# Altium PCB main_board.PcbDoc (part 2 of 2)
Units mm, origin at the board's own origin, x right, y up, seen from the top; angles counter-clockwise.
Board outline 279.4 x 215.91 mm, 2 copper layers (Top Layer, Bottom Layer), stack 2.452 mm thick; 96 components, 340 nets, 967 pads, 108 vias.
Unrouted connection lines stored in the file: 86.
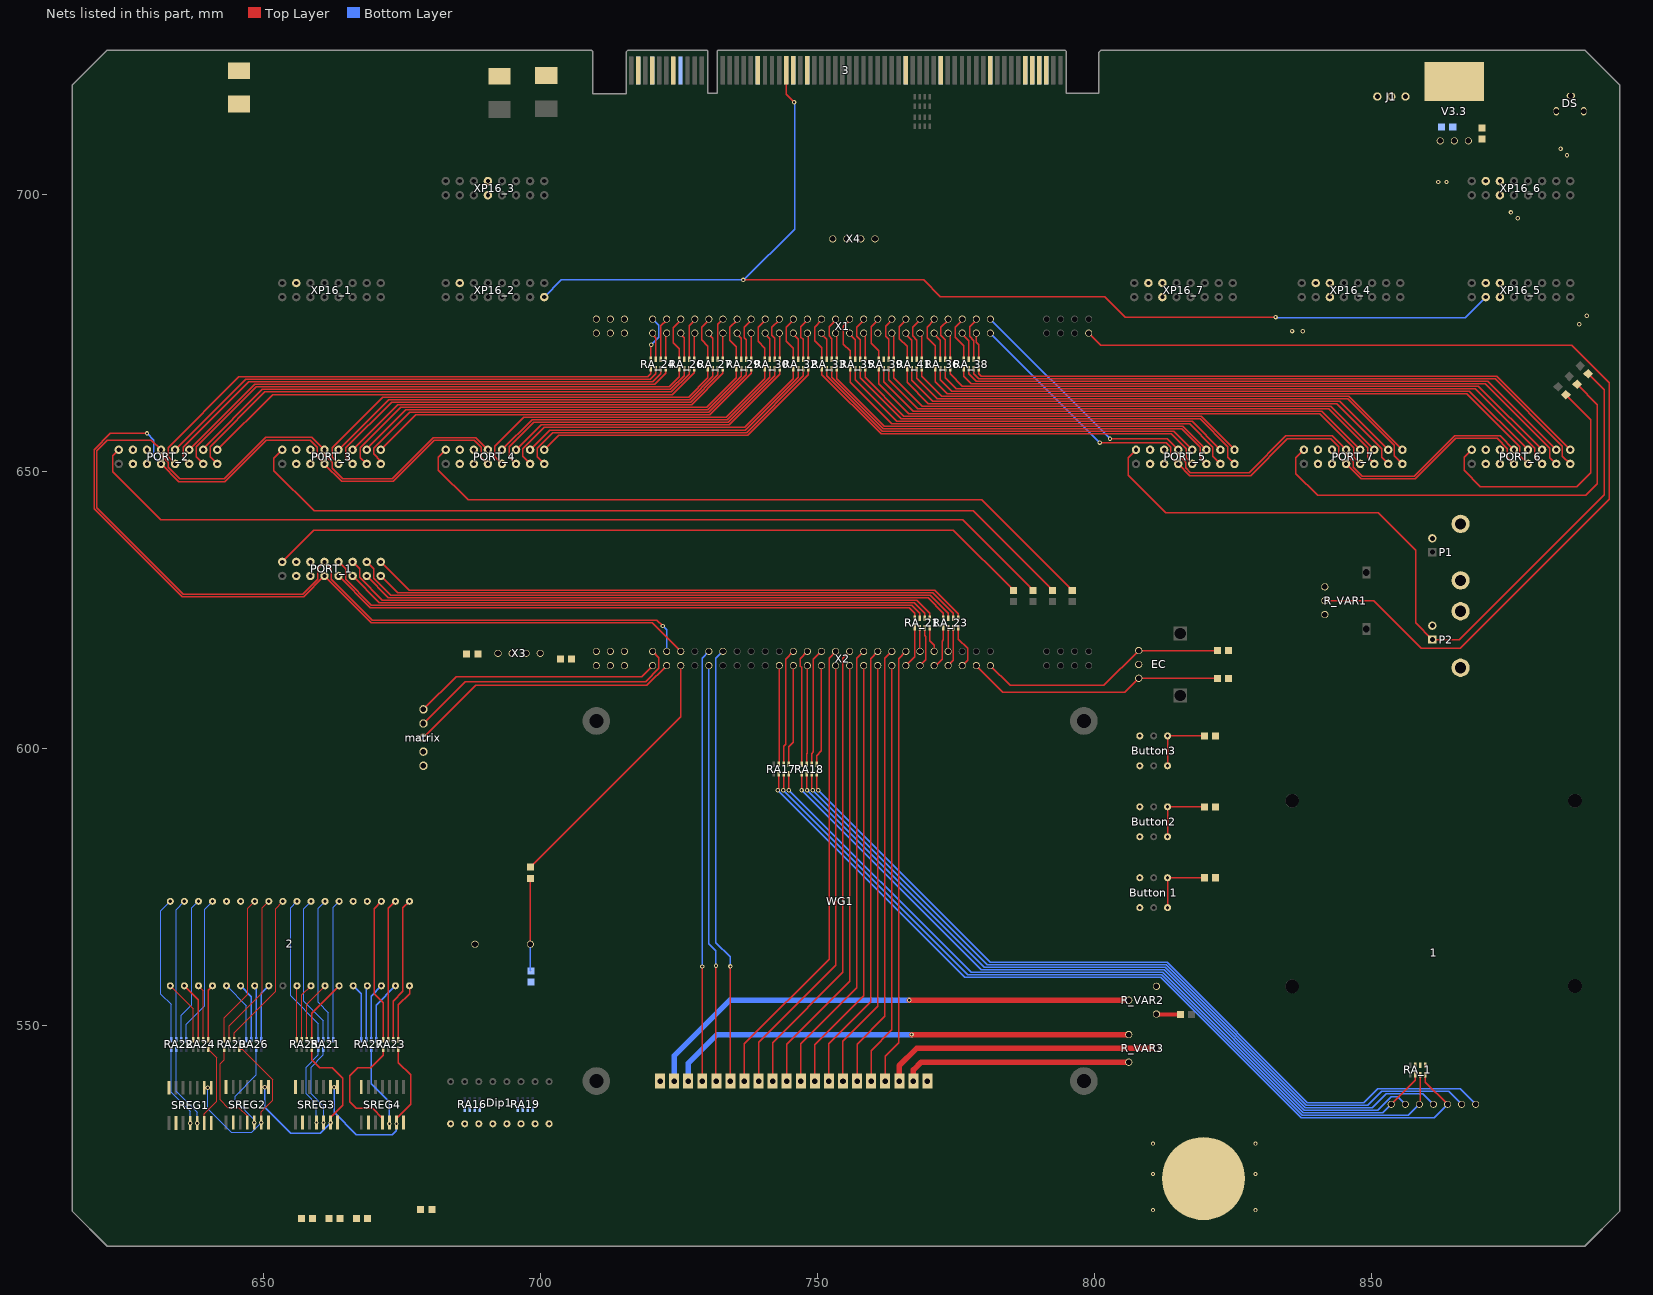
[diagram p2: the nets of this part, all layers, seen from the top]

## Via types
v1: diameter 0.8, hole 0.4, Top Layer to Bottom Layer, 102 vias
v2: diameter 0.7, hole 0.4, Top Layer to Bottom Layer, 6 vias

## Nets (pads, with @x,y where several pads share a name; then routed paths per layer and width w, separated by ;. In a path a pad name is that pad's centre, name@x,y a point inside that pad or via, vN(x,y) a via of type N, cw(c..) or ccw(c..) an arc to the next point about the centre after c; other vN are vias at no path point) (continued)
EAI_7-: 3.20 XP16_2.2 XP16_5.14 | length 217.9
  Top Layer w0.254: v1(736.5,684.6) 769.058,684.6 772.058,681.6 801.774,681.6 805.475,677.899 v1(832.598,677.899) ; 3.20@744.25,722.46 744.263,722.447 744.263,718.113 v1(745.7,716.676)
  Bottom Layer w0.254: XP16_2.2@700.59,681.5 703.69,684.6 v1(736.5,684.6) 736.6,684.6 745.774,693.774 v1@745.774,716.603 ; v1(832.598,677.899) 832.749,677.748 866.798,677.748 XP16_5.14@870.55,681.5
ENC_A: EC.1 R19.1 X2.36 | length 45.1
  Top Layer w0.254: X2.36@781.12,615 784.72,611.4 801.6,611.4 EC.1@807.9,617.7 R19.1@822.1,617.7
ENC_B: EC.3 R18.1 X2.37 | length 46.5
  Top Layer w0.254: X2.37@778.58,615 783.38,610.2 805.4,610.2 EC.3@807.9,612.7 R18.1@822.1,612.7
EVCC5: 3.62 3.63 3.64 J1.2
F1: RA22.0 SREG1.11 | length 14.8
  Bottom Layer w0.2: RA22.0@633.25,545.75 633.25,537.95 636.69,534.51 v1(636.69,532.4)
F2: RA20.7 SREG2.11 | length 16.8
  Top Layer w0.2: RA20.7@642.85,545.75 642.85,543.85 642.1,543.1 642.1,536.6 643.5,535.2 645.5,535.2 646.99,533.71 SREG2.11@646.99,532.5
F3: RA21.0 SREG3.11 | length 15
  Bottom Layer w0.2: v1(659.49,532.5) 659.49,535.81 657.6,537.7 657.6,542.5 659.85,544.75 RA21.0@659.85,545.75
F4: RA23.3 SREG4.11 | length 21.5
  Top Layer w0.254: SREG4.11@671.39,532.3 671.39,533.31 669.6,535.1 666.7,535.1 665.5,536.3 665.5,540.942 666.958,542.4 669.3,542.4 671.55,544.65 RA23.3@671.55,545.75
G1: RA22.1 SREG1.12 | length 14.9
  Bottom Layer w0.2: RA22.1@634.15,545.75 634.15,538.15 637.96,534.34 v1(637.96,532.4)
G2: RA26.2 SREG2.12 | length 16.3
  Bottom Layer w0.2: v1(648.26,532.5) 648.26,533.04 644.8,536.5 644.8,537.3 648.65,541.15 RA26.2@648.65,545.75
G3: RA21.1 SREG3.12 | length 15.2
  Top Layer w0.2: v1(660.76,532.5) SREG3.12@660.8,532.54
  Bottom Layer w0.2: RA21.1@660.75,545.75 660.75,544.75 658.5,542.5 658.5,537.7 660.76,535.44 v1(660.76,532.5)
G4: RA27.6 SREG4.12 | length 14.8
  Bottom Layer w0.254: RA27.6@669.35,545.75 669.35,539.55 672.66,536.24 v1(672.66,532.3)
GND: 3.1 3.3 3.6 3.16 3.21 3.23 3.37 3.42 3.49 3.54 3.55 3.56 3.57 3.65 3.70 3.77 3.82 3.96 3.98 3.103 3.112 3.116 3.118 "Button 1.1" "Button 1.4" Button2.1 Button2.4 Button3.1 Button3.4 C1.1 C2.1 C3.1 C4.1 C5.1 C6.2 C7.1 C10.2 C16.2 C17.2 Dip1.9 Dip1.10 Dip1.11 Dip1.12 Dip1.13 Dip1.14 Dip1.15 Dip1.16 DS.0 EC.2 matrix.2 P0RT_3.13 P0RT_3.14 P1.2 P2.2 pad.discharge PORT_1.13 PORT_1.14 PORT_2.13 PORT_2.14 PORT_4.13 PORT_4.14 PORT_5.13 PORT_5.14 PORT_6.13 PORT_6.14 PORT_7.13 PORT_7.14 R_VAR1.3 R_VAR2.3 Sound1.0 SREG1.7 SREG2.7 SREG3.7 SREG4.7 V3.3.0 WG1.0 WG1.19 X1.61 X1.62 X1.63 X2.0 X2.1 X2.2 X3.4 X4.4 XP16_1.13 XP16_2.13 XP16_3.9 XP16_3.10 XP16_4.13 XP16_5.13 XP16_6.13 XP16_7.13
  other v2: 810.5,516.7 829,516.7 810.5,523.2 829,523.2 810.5,528.7 829,528.7
H1: RA24.0 SREG1.13 | length 14.9
  Top Layer w0.2: SREG1.13@639.23,532.4 639.23,534.13 641.5,536.4 641.5,544.2 RA24.0@639.95,545.75
H2: RA20.4 SREG1.1 SREG1.2 SREG2.13 | length 34.1
  Top Layer w0.2: SREG1.2@639.23,538.8 v1(639.865,538.8) SREG1.1@640.5,538.8 ; RA20.4@645.55,545.75 646.05,545.75 651.6,540.2 651.6,536.5 649.53,534.43 v1(649.53,532.5)
  Bottom Layer w0.2: v1(639.865,538.8) 639.865,535.035 644.1,530.8 647.83,530.8 v1(649.53,532.5)
H3: RA25.4 SREG2.1 SREG2.2 SREG3.13 | length 37.2
  Top Layer w0.254: SREG2.2@649.53,538.9 v1(650.165,538.9) SREG2.1@650.8,538.9 ; RA25.4@658.65,545.75 658.65,543.85 660.1,542.4 662.3,542.4 664.2,540.5 664.2,535.6 662.03,533.43 v1(662.03,532.5)
  Bottom Layer w0.254: v1(650.165,538.9) 650.165,535.235 654.8,530.6 660.13,530.6 v1(662.03,532.5)
H4: RA23.0 SREG3.1 SREG3.2 SREG4.13 | length 35.8
  Top Layer w0.254: SREG3.2@662.03,538.9 v1(662.665,538.9) SREG3.1@663.3,538.9 ; v1(673.93,532.3) 673.93,533.23 676.5,535.8 676.5,541.1 674.25,543.35 RA23.0@674.25,545.75
  Bottom Layer w0.254: v1(662.665,538.9) 662.665,534.335 666.7,530.3 673.2,530.3 673.93,531.03 v1(673.93,532.3)
I2C_SCL: P0RT_3.9 PORT_1.9 PORT_2.9 PORT_4.9 R7.2 X2.4 X3.3 | length 220
  Top Layer w0.254: PORT_4.9@690.43,653.94 688.216,656.154 680.589,656.154 673.135,648.7 664.2,648.7 662.3,650.6 662.3,651.7 660.93,653.07 P0RT_3.9@660.93,653.94 658.67,656.2 650.3,656.2 642.8,648.7 634.8,648.7 632.7,650.8 632.7,651.7 631.43,652.97 PORT_2.9@631.43,653.94 629.67,655.7 621.742,655.7 619.837,653.795 619.837,643.471 635.414,627.895 657.01,627.895 659.7,630.585 659.7,632.483 PORT_1.9@660.93,633.713 662.146,632.496 662.146,630.598 669.545,623.2 720.94,623.2 v1(722,622.14)
  Bottom Layer w0.254: v1(722,622.14) 722.7,621.44 X2.4@722.7,617.54
I2C_SDA: P0RT_3.10 PORT_1.10 PORT_2.10 PORT_4.10 R8.2 X2.5 X3.2 | length 221
  Top Layer w0.254: v1(628.9,656.9) 622.3,656.9 619.383,653.983 619.383,643.283 635.226,627.441 657.198,627.441 PORT_1.10@660.93,631.173 669.403,622.7 720.08,622.7 X2.5@725.24,617.54 ; PORT_2.10@631.43,651.4 634.63,648.2 642.942,648.2 650.412,655.67 658.359,655.67 659.6,654.429 659.6,652.73 P0RT_3.10@660.93,651.4 660.93,651.328 664.012,648.246 673.323,648.246 680.777,655.7 687.934,655.7 689.2,654.434 689.2,652.63 PORT_4.10@690.43,651.4
  Bottom Layer w0.254: v1(628.9,656.9) 630.1,655.7 630.1,652.73 PORT_2.10@631.43,651.4
KLAV_STB1: RA17.2 X2.13 | length 21.1
  Top Layer w0.254: RA17.2@743.85,597.15 743.85,600.45 744.198,600.798 744.198,616.178 X2.13@745.56,617.54
KLAV_STB2: RA17.3 X2.50 | length 18.2
  Top Layer w0.254: RA17.3@744.75,597.15 744.75,600.35 745.56,601.16 X2.50@745.56,615
KLAV_STB3: RA17.1 X2.51 | length 17.8
  Top Layer w0.254: RA17.1@743.02,597.22 X2.51@743.02,615
KLAV_STR1: RA18.0 X2.14 | length 21
  Top Layer w0.254: RA18.0@747.05,597.15 747.05,614.65 746.8,614.9 746.8,616.24 X2.14@748.1,617.54
KLAV_STR2: RA18.3 X2.48 | length 18.2
  Top Layer w0.254: RA18.3@749.75,597.15 749.75,598.75 750.64,599.64 X2.48@750.64,615
KLAV_STR3: RA18.2 X2.15 | length 21.1
  Top Layer w0.254: RA18.2@748.85,597.15 748.85,599.05 749.198,599.398 749.198,616.098 X2.15@750.64,617.54
KLAV_STR4: RA18.1 X2.49 | length 17.9
  Top Layer w0.254: RA18.1@747.95,597.15 747.95,599.05 748.1,599.2 X2.49@748.1,615
LCD_CS1: WG1.14 X2.8 | length 79.1
  Top Layer w0.254: WG1.14@734.2,540 v1(734.2,560.7)
  Bottom Layer w0.254: X2.8@732.86,617.54 731.6,616.28 731.6,565 734.2,562.4 v1(734.2,560.7)
LCD_CS2: WG1.15 X2.56 | length 75.6
  Top Layer w0.254: v1(731.6,560.8) 731.6,540.06 WG1.15@731.66,540
  Bottom Layer w0.254: X2.56@730.32,615 730.32,564.8 731.6,563.52 v1(731.6,560.8)
LCD_D/I: WG1.3 X2.21 | length 79.1
  Top Layer w0.254: WG1.3@762.14,540 762.14,544.44 764.6,546.9 764.6,616.26 X2.21@765.88,617.54
LCD_DB0: WG1.6 X2.44 | length 77.6
  Top Layer w0.254: WG1.6@754.52,540 754.52,547.22 760.8,553.5 X2.44@760.8,615
LCD_DB1: WG1.7 X2.19 | length 81.2
  Top Layer w0.254: WG1.7@751.98,540 751.98,546.78 759.5,554.3 759.5,616.24 X2.19@760.8,617.54
LCD_DB2: WG1.8 X2.45 | length 78.7
  Top Layer w0.254: WG1.8@749.44,540 749.44,546.54 758.26,555.36 X2.45@758.26,615
LCD_DB3: WG1.9 X2.18 | length 82.2
  Top Layer w0.254: WG1.9@746.9,540 746.9,546.7 757,556.8 757,616.28 X2.18@758.26,617.54
LCD_DB4: WG1.10 X2.46 | length 79.7
  Top Layer w0.254: WG1.10@744.36,540 744.36,546.66 755.72,558.02 X2.46@755.72,615
LCD_DB5: WG1.11 X2.17 | length 83.3
  Top Layer w0.254: WG1.11@741.82,540 741.82,546.92 754.5,559.6 754.5,616.32 X2.17@755.72,617.54
LCD_DB6: WG1.12 X2.47 | length 80.8
  Top Layer w0.254: WG1.12@739.28,540 739.28,546.98 753.18,560.88 X2.47@753.18,615
LCD_DB7: WG1.13 X2.16 | length 84.3
  Top Layer w0.254: WG1.13@736.74,540 736.74,546.74 752,562 752,616.36 X2.16@753.18,617.54
LCD_OE: WG1.5 X2.20 | length 80.1
  Top Layer w0.254: WG1.5@757.06,540 757.06,546.66 762.1,551.7 762.1,616.3 X2.20@763.34,617.54
LCD_R/W: WG1.4 X2.43 | length 76.5
  Top Layer w0.254: WG1.4@759.6,540 759.6,545.5 763.34,549.24 X2.43@763.34,615
LCD_RST: WG1.16 X2.7 | length 78
  Top Layer w0.254: WG1.16@729.12,540 v1(729.12,560.68)
  Bottom Layer w0.254: v1(729.12,560.68) 729.12,616.34 X2.7@730.32,617.54
LCD_VOUT: R_VAR3.1 WG1.17 | length 84.9
  Top Layer w1: v1(766.9,548.4) R_VAR3.1@806.1,548.4
  Bottom Layer w1: WG1.17@726.58,540 726.58,543.18 731.8,548.4 v1(766.9,548.4)
LM_CLK: matrix.5 X2.60 | length 44.6
  Top Layer w0.254: matrix.5@678.8,607.08 684.72,613 718.16,613 X2.60@720.16,615
LM_CS: matrix.4 X2.3 | length 50.1
  Top Layer w0.254: matrix.4@678.8,604.54 686.36,612.1 718.9,612.1 721.3,614.5 721.3,616.4 X2.3@720.16,617.54
LM_DIN: matrix.3 X2.59 | length 49.3
  Top Layer w0.254: matrix.3@678.8,602 688.2,611.4 719.1,611.4 X2.59@722.7,615
Net1_1: 1.1 RA17.4 RA_1.2 | length 143.6
  Top Layer w0.254: v1(744.75,592.5) RA17.4@744.75,595.45 ; 1.1@853.48,535.8 857.85,540.17 RA_1.2@857.85,541.15
  Bottom Layer w0.254: v1(744.75,592.5) 777.642,559.608 812.276,559.608 837.6,534.284 851.964,534.284 1.1@853.48,535.8
Net1_2: 1.2 RA18.7 | length 137.5
  Top Layer w0.254: v1(747.05,592.5) RA18.7@747.05,595.45
  Bottom Layer w0.254: v1(747.05,592.5) 747.05,592.472 779.46,560.062 812.464,560.062 837.788,534.738 851.058,534.738 853.52,537.2 854.62,537.2 1.2@856.02,535.8
Net1_3: 1.3 RA17.5 RA_1.1 | length 148.4
  Top Layer w0.254: v1(743.75,592.5) 743.85,592.6 RA17.5@743.85,595.45 ; 1.3@858.56,535.8 858.75,535.99 RA_1.1@858.75,541.15
  Bottom Layer w0.254: v1(743.75,592.5) 743.75,592.472 777.068,559.154 812.088,559.154 837.412,533.83 856.59,533.83 1.3@858.56,535.8
Net1_4: 1.4 RA18.6 | length 141.6
  Top Layer w0.254: RA18.6@747.95,595.45 747.95,592.6 v1(748.05,592.5)
  Bottom Layer w0.254: v1(748.05,592.5) 748.05,592.472 780.006,560.516 812.652,560.516 837.976,535.192 850.092,535.192 852.6,537.7 859.2,537.7 1.4@861.1,535.8
Net1_5: 1.5 RA17.6 RA_1.0 | length 156.4
  Top Layer w0.254: v1(742.75,592.5) 742.95,592.7 RA17.6@742.95,595.45 ; RA_1.0@859.65,541.15 859.65,539.79 1.5@863.64,535.8
  Bottom Layer w0.254: v1(742.75,592.5) 742.75,592.472 776.522,558.7 811.9,558.7 837.224,533.376 861.216,533.376 1.5@863.64,535.8
Net1_6: 1.6 RA18.5 | length 145.7
  Top Layer w0.254: RA18.5@748.85,595.45 748.85,592.7 v1(749.05,592.5)
  Bottom Layer w0.254: v1(749.05,592.5) 749.05,592.472 780.552,560.97 812.84,560.97 838.164,535.646 849.246,535.646 851.754,538.154 863.826,538.154 1.6@866.18,535.8
Net1_7: 1.7 RA18.4 | length 147.3
  Top Layer w0.254: RA18.4@749.75,595.45 749.75,592.828 750.05,592.528 v1(750.05,592.5)
  Bottom Layer w0.254: v1(750.05,592.5) 781.126,561.424 813.028,561.424 838.352,536.1 848.5,536.1 851.008,538.608 865.912,538.608 1.7@868.72,535.8
Net2_1: 2.1 RA24.4 | length 11.5
  Top Layer w0.2: 2.1@633.1,557.2 637.25,553.05 RA24.4@637.25,547.45
Net2_2: 2.2 RA24.5 | length 10.8
  Top Layer w0.254: 2.2@635.64,557.2 638.15,554.69 RA24.5@638.15,547.45
Net2_3: 2.3 RA24.6 | length 10.1
  Top Layer w0.2: 2.3@638.18,557.2 639.05,556.33 RA24.6@639.05,547.45
Net2_4: 2.4 RA24.7 | length 10.1
  Top Layer w0.254: RA24.7@639.95,547.45 639.95,556.43 2.4@640.72,557.2
Net2_5: 2.5 RA26.7 | length 11.2
  Bottom Layer w0.2: 2.5@643.26,557.2 646.85,553.61 RA26.7@646.85,547.45
Net2_6: 2.6 RA26.6 | length 10.6
  Bottom Layer w0.254: 2.6@645.8,557.2 647.75,555.25 RA26.6@647.75,547.45
Net2_7: 2.7 RA26.5 | length 9.9
  Bottom Layer w0.254: 2.7@648.34,557.2 648.65,556.89 RA26.5@648.65,547.45
Net2_8: 2.8 RA26.4 | length 10.3
  Bottom Layer w0.254: RA26.4@649.55,547.45 649.55,555.87 2.8@650.88,557.2
Net2_10: 2.10 RA25.0 | length 9.7
  Top Layer w0.2: RA25.0@655.95,547.45 2.10@655.95,557.19
Net2_11: 2.11 RA25.1 | length 10.4
  Top Layer w0.2: RA25.1@656.85,547.45 656.85,555.55 2.11@658.5,557.2
Net2_12: 2.12 RA25.2 | length 11.1
  Top Layer w0.2: RA25.2@657.75,547.45 657.75,553.91 2.12@661.04,557.2
Net2_13: 2.13 RA25.3 | length 11.8
  Top Layer w0.254: RA25.3@658.65,547.45 658.65,552.27 2.13@663.58,557.2
Net2_14: 2.14 RA27.3 | length 10.3
  Bottom Layer w0.254: 2.14@666.12,557.2 667.55,555.77 RA27.3@667.55,547.45
Net2_15: 2.15 RA27.2 | length 9.8
  Bottom Layer w0.254: RA27.2@668.45,547.45 668.45,556.99 2.15@668.66,557.2
Net2_16: 2.16 RA27.1 | length 10.5
  Bottom Layer w0.254: RA27.1@669.35,547.45 669.35,555.35 2.16@671.2,557.2
Net2_17: 2.17 RA27.0 | length 11.2
  Bottom Layer w0.254: RA27.0@670.25,547.45 670.25,553.71 2.17@673.74,557.2
Net2_18: 2.18 RA23.7 | length 10.6
  Top Layer w0.254: RA23.7@674.25,547.45 674.25,553.75 676.28,555.78 2.18@676.28,557.2
Net2_19: 2.19 RA23.6 | length 26.2
  Top Layer w0.254: RA23.6@673.35,547.45 673.35,554.45 675.1,556.2 675.1,571.26 2.19@676.28,572.44
Net2_20: 2.20 RA23.5 | length 25.5
  Top Layer w0.254: RA23.5@672.45,547.45 672.45,571.15 2.20@673.74,572.44
Net2_21: 2.21 RA23.4 | length 26.2
  Top Layer w0.254: 2.21@671.2,572.44 669.9,571.14 669.9,555.8 671.55,554.15 RA23.4@671.55,547.45
Net2_24: 2.24 RA21.4 | length 25.4
  Bottom Layer w0.2: RA21.4@662.55,547.45 662.55,571.41 2.24@663.58,572.44
Net2_25: 2.25 RA21.5 | length 26.3
  Bottom Layer w0.2: 2.25@661.04,572.44 659.8,571.2 659.8,554.2 661.65,552.35 RA21.5@661.65,547.45
Net2_26: 2.26 RA21.6 | length 27
  Bottom Layer w0.2: 2.26@658.5,572.44 657.2,571.14 657.2,554.4 660.75,550.85 RA21.6@660.75,547.45
Net2_27: 2.27 RA21.7 | length 27.6
  Bottom Layer w0.2: 2.27@655.96,572.44 654.8,571.28 654.8,555.4 659.85,550.35 RA21.7@659.85,547.45
Net2_28: 2.28 RA20.2 | length 28.6
  Top Layer w0.2: RA20.2@644.65,547.45 644.65,548.75 652.1,556.2 652.1,571.12 2.28@653.42,572.44
Net2_29: 2.29 RA20.1 | length 27.9
  Top Layer w0.2: RA20.1@643.75,547.45 643.75,549.95 649.7,555.9 649.7,571.26 2.29@650.88,572.44
Net2_30: 2.30 RA20.0 | length 27.3
  Top Layer w0.2: RA20.0@642.85,547.45 642.85,551.45 647.1,555.7 647.1,571.2 2.30@648.34,572.44
Net2_33: 2.33 RA22.4 | length 27
  Bottom Layer w0.2: RA22.4@635.95,547.45 635.95,550.25 639.3,553.6 639.3,571.02 2.33@640.72,572.44
Net2_34: 2.34 RA22.5 | length 26.3
  Bottom Layer w0.2: RA22.5@635.05,547.45 635.05,551.85 637,553.8 637,571.26 2.34@638.18,572.44
Net2_35: 2.35 RA22.6 | length 25.6
  Bottom Layer w0.2: RA22.6@634.15,547.45 634.15,570.95 2.35@635.64,572.44
Net2_36: 2.36 RA22.7 | length 26.5
  Bottom Layer w0.2: 2.36@633.1,572.44 631.4,570.74 631.4,555.7 633.25,553.85 RA22.7@633.25,547.45
NetButton2_3: Button2.3 Button2.6 R10.2 | length 12.1
  Top Layer w0.254: Button2.6@813.1,584.1 Button2.3@813.1,589.5 R10.2@819.8,589.5
NetButton3_3: Button3.3 Button3.6 R11.2 | length 12.1
  Top Layer w0.254: Button3.6@813.1,596.9 Button3.3@813.1,602.3 R11.2@819.8,602.3
"NetButton 1_3": "Button 1.3" "Button 1.6" R9.2 | length 12.1
  Top Layer w0.254: 813.1,571.3 813.1,576.7 R9.2@819.8,576.7
NetC1_2: C1.2 R6.2 Sound1.1 | length 16.7
  Top Layer w0.254: Sound1.1@698.1,564.7 R6.2@698.1,576.6
  Bottom Layer w0.254: Sound1.1@698.1,564.7 698.1,560 C1.2@698.2,559.9
NetR2_1: R2.1 R_VAR2.1 | length 4.3
  Top Layer w0.7: R_VAR2.1@811.1,552.1 811.2,552 R2.1@815.4,552
NetR_VAR2_2: R_VAR2.2 WG1.18 | length 90.8
  Top Layer w1: v1(766.5,554.6) R_VAR2.2@806.1,554.6
  Bottom Layer w1: WG1.18@724.04,540 724.04,544.54 734.1,554.6 v1(766.5,554.6)
NetR_VAR3_2: R_VAR3.2 WG1.2 | length 50.5
  Top Layer w1: WG1.2@764.68,540 764.68,542.78 767.8,545.9 R_VAR3.2@811.1,545.9
PGIO_1_1: PORT_1.1 RA_23.7 | length 109
  Top Layer w0.254: PORT_1.1@671.09,633.713 676.203,628.6 771.124,628.6 775.35,624.374 RA_23.7@775.35,623.55
PGIO_1_2: PORT_1.2 RA_23.6 | length 107
  Top Layer w0.254: PORT_1.2@671.09,631.173 674.117,628.146 770.73,628.146 774.45,624.426 RA_23.6@774.45,623.55
PGIO_1_3: PORT_1.3 RA_23.5 | length 110.7
  Top Layer w0.254: PORT_1.3@668.55,633.713 669.8,632.463 669.8,630.8 672.908,627.692 770.313,627.692 773.55,624.455 RA_23.5@773.55,623.55
PGIO_1_4: PORT_1.4 RA_23.4 | length 107.8
  Top Layer w0.254: PORT_1.4@668.55,631.173 672.485,627.238 769.867,627.238 772.65,624.455 RA_23.4@772.65,623.55
PGIO_1_5: PORT_1.5 RA_21.3 | length 109.8
  Top Layer w0.254: PORT_1.5@666.01,633.713 667.257,632.466 667.257,630.926 671.399,626.784 767.821,626.784 770.15,624.455 RA_21.3@770.15,623.55
PGIO_1_6: PORT_1.6 RA_21.2 | length 106.9
  Top Layer w0.254: PORT_1.6@666.01,631.173 670.853,626.33 767.375,626.33 769.25,624.455 RA_21.2@769.25,623.55
PGIO_1_7: PORT_1.7 RA_21.1 | length 110.7
  Top Layer w0.254: PORT_1.7@663.47,633.713 664.728,632.455 664.728,630.557 669.409,625.876 766.929,625.876 768.35,624.455 RA_21.1@768.35,623.55
PGIO_1_8: PORT_1.8 RA_21.0 | length 107.7
  Top Layer w0.254: PORT_1.8@663.47,631.173 669.221,625.422 766.483,625.422 767.45,624.455 RA_21.0@767.45,623.55
PGIO_1_15_AO1: PORT_1.15 R1.1 | length 138.8
  Top Layer w0.254: PORT_1.15@653.31,633.713 658.997,639.4 774.461,639.4 R1.1@785.3,628.561
PGIO_2_1: PORT_2.1 RA_26.4 | length 92.6
  Top Layer w0.254: PORT_2.1@641.59,653.94 651.572,663.922 723.748,663.922 727.686,667.86 RA_26.4@727.686,668.55
PGIO_2_2: PORT_2.2 RA_26.5 | length 96.5
  Top Layer w0.254: PORT_2.2@641.59,651.4 640.3,652.69 640.3,654.5 650.176,664.376 723.56,664.376 726.786,667.602 RA_26.5@726.786,668.55
PGIO_2_3: PORT_2.3 RA_26.6 | length 93.7
  Top Layer w0.254: PORT_2.3@639.05,653.94 639.05,654.15 649.73,664.83 723.372,664.83 725.886,667.344 RA_26.6@725.886,668.55
PGIO_2_4: PORT_2.4 RA_26.7 | length 97.5
  Top Layer w0.254: PORT_2.4@639.05,651.4 637.8,652.65 637.8,654.5 648.584,665.284 723.184,665.284 724.986,667.086 RA_26.7@724.986,668.55
PGIO_2_5: PORT_2.5 RA_24.0 | length 92.6
  Top Layer w0.254: PORT_2.5@636.51,653.94 648.308,665.738 720.538,665.738 722.55,667.75 RA_24.0@722.55,668.55
PGIO_2_6: PORT_2.6 RA_24.1 | length 96.1
  Top Layer w0.254: PORT_2.6@636.51,651.4 635.421,652.489 635.421,654.391 647.222,666.192 720.197,666.192 721.65,667.645 RA_24.1@721.65,668.55
PGIO_2_7: PORT_2.7 RA_24.2 | length 93.4
  Top Layer w0.254: PORT_2.7@633.97,653.94 646.676,666.646 719.751,666.646 720.75,667.645 RA_24.2@720.75,668.55
PGIO_2_8: PORT_2.8 RA_24.3 | length 97
  Top Layer w0.254: PORT_2.8@633.97,651.4 632.7,652.67 632.7,654.3 645.5,667.1 719.305,667.1 719.85,667.645 RA_24.3@719.85,668.55
PGIO_2_15_AO2: PORT_2.15 R17.1 | length 179.4
  Top Layer w0.254: PORT_2.15@623.81,653.94 622.7,652.83 622.7,650 631.4,641.3 776.094,641.3 R17.1@788.833,628.561
PGIO_3_1: P0RT_3.1 RA_29.0 | length 73.4
  Top Layer w0.254: P0RT_3.1@671.09,653.94 677.44,660.29 730.49,660.29 737.959,667.759 RA_29.0@737.959,668.55
PGIO_3_2: P0RT_3.2 RA_29.1 | length 77.1
  Top Layer w0.254: P0RT_3.2@671.09,651.4 671.09,651.91 669.8,653.2 669.8,654.19 676.354,660.744 730.302,660.744 737.059,667.501 RA_29.1@737.059,668.55
PGIO_3_3: P0RT_3.3 RA_29.2 | length 74.5
  Top Layer w0.254: P0RT_3.3@668.55,653.94 668.55,654.15 675.598,661.198 730.114,661.198 736.159,667.243 RA_29.2@736.159,668.55
PGIO_3_4: P0RT_3.4 RA_29.3 | length 78.1
  Top Layer w0.254: P0RT_3.4@668.55,651.4 667.4,652.55 667.4,654.33 674.722,661.652 729.926,661.652 735.259,666.985 RA_29.3@735.259,668.55
PGIO_3_5: P0RT_3.5 RA_27.0 | length 73.3
  Top Layer w0.254: P0RT_3.5@666.01,653.94 674.176,662.106 727.206,662.106 732.823,667.723 RA_27.0@732.823,668.55
PGIO_3_6: P0RT_3.6 RA_27.1 | length 77
  Top Layer w0.254: P0RT_3.6@666.01,651.4 664.8,652.61 664.8,654.27 673.09,662.56 727.018,662.56 731.923,667.465 RA_27.1@731.923,668.55
PGIO_3_7: P0RT_3.7 RA_27.2 | length 74.4
  Top Layer w0.254: P0RT_3.7@663.47,653.94 672.544,663.014 726.83,663.014 731.023,667.207 RA_27.2@731.023,668.55
PGIO_3_8: P0RT_3.8 RA_27.3 | length 78.1
  Top Layer w0.254: P0RT_3.8@663.47,651.4 662.3,652.57 662.3,654.31 671.458,663.468 726.642,663.468 730.123,666.949 RA_27.3@730.123,668.55
PGIO_3_15_AO3: P0RT_3.15 R12.1 | length 153.9
  Top Layer w0.254: P0RT_3.15@653.31,653.94 651.8,652.43 651.8,650.2 659.1,642.9 778.027,642.9 R12.1@792.367,628.561
PGIO_4_1: PORT_4.1 RA_32.4 | length 54.3
  Top Layer w0.254: PORT_4.1@700.59,653.94 703.25,656.6 737.3,656.6 748.232,667.532 RA_32.4@748.232,668.55
PGIO_4_2: PORT_4.2 RA_32.5 | length 58.1
  Top Layer w0.254: PORT_4.2@700.59,651.4 699.3,652.69 699.3,654.2 702.154,657.054 737.112,657.054 747.332,667.274 RA_32.5@747.332,668.55
PGIO_4_3: PORT_4.3 RA_32.6 | length 55.3
  Top Layer w0.254: PORT_4.3@698.05,653.94 701.618,657.508 736.924,657.508 746.432,667.016 RA_32.6@746.432,668.55
PGIO_4_4: PORT_4.4 RA_32.7 | length 59.1
  Top Layer w0.254: PORT_4.4@698.05,651.4 696.7,652.75 696.7,654.13 700.59,658.02 736.794,658.02 745.532,666.758 RA_32.7@745.532,668.55
PGIO_4_5: PORT_4.5 RA_30.4 | length 54.2
  Top Layer w0.254: PORT_4.5@695.51,653.94 700.044,658.474 734,658.474 743.095,667.569 RA_30.4@743.095,668.55
PGIO_4_6: PORT_4.6 RA_30.5 | length 58
  Top Layer w0.254: PORT_4.6@695.51,651.4 694.3,652.61 694.3,654.5 698.728,658.928 733.812,658.928 742.195,667.311 RA_30.5@742.195,668.55
PGIO_4_7: PORT_4.7 RA_30.6 | length 55.3
  Top Layer w0.254: PORT_4.7@692.97,653.94 698.412,659.382 733.624,659.382 741.295,667.053 RA_30.6@741.295,668.55
PGIO_4_8: PORT_4.8 RA_30.7 | length 59.2
  Top Layer w0.254: PORT_4.8@692.97,651.4 691.7,652.67 691.7,654.6 696.936,659.836 733.436,659.836 740.395,666.795 RA_30.7@740.395,668.55
PGIO_4_15_AO4: PORT_4.15 R15.1 | length 127.6
  Top Layer w0.254: PORT_4.15@682.81,653.94 681.5,652.63 681.5,650.261 686.861,644.9 779.561,644.9 R15.1@795.9,628.561
PGIO_5_1: PORT_5.1 RA_35.0 | length 73.6
  Top Layer w0.254: RA_35.0@758.505,668.55 758.505,666.995 765.522,659.978 819.152,659.978 PORT_5.1@825.19,653.94
PGIO_5_2: PORT_5.2 RA_35.1 | length 76.8
  Top Layer w0.254: RA_35.1@757.605,668.55 757.605,666.923 765.003,659.524 818.964,659.524 824,654.488 824,652.59 PORT_5.2@825.19,651.4
PGIO_5_3: PORT_5.3 RA_35.2 | length 73.2
  Top Layer w0.254: RA_35.2@756.705,668.55 756.705,666.55 764.184,659.07 817.52,659.07 PORT_5.3@822.65,653.94
PGIO_5_4: PORT_5.4 RA_35.3 | length 76.3
  Top Layer w0.254: RA_35.3@755.805,668.55 755.805,666.177 763.366,658.616 817.084,658.616 821.3,654.4 821.3,652.75 PORT_5.4@822.65,651.4
PGIO_5_5: PORT_5.5 RA_33.0 | length 73.8
  Top Layer w0.254: RA_33.0@753.368,668.55 753.368,666.758 761.964,658.162 815.888,658.162 PORT_5.5@820.11,653.94
PGIO_5_6: PORT_5.6 RA_33.1 | length 76.8
  Top Layer w0.254: RA_33.1@752.468,668.55 752.468,667.016 761.776,657.708 815.7,657.708 819.021,654.387 819.021,652.489 PORT_5.6@820.11,651.4
PGIO_5_7: PORT_5.7 RA_33.2 | length 72.8
  Top Layer w0.254: RA_33.2@751.568,668.55 751.568,667.274 761.588,657.254 814.256,657.254 PORT_5.7@817.57,653.94
PGIO_5_8: PORT_5.8 RA_33.3 | length 75.6
  Top Layer w0.254: RA_33.3@750.668,668.55 750.668,667.532 761.4,656.8 813.8,656.8 816.441,654.159 816.441,652.529 PORT_5.8@817.57,651.4
PGIO_6_1: PORT_6.1 RA_38.4 | length 113.3
  Top Layer w0.254: RA_38.4@779.05,668.55 779.05,667.645 779.453,667.242 872.527,667.242 885.79,653.979 PORT_6.1@885.79,653.94
PGIO_6_2: PORT_6.2 RA_38.5 | length 116.3
  Top Layer w0.254: RA_38.5@778.15,668.55 778.15,667.645 779.007,666.788 872.212,666.788 884.373,654.627 884.373,652.817 PORT_6.2@885.79,651.4
PGIO_6_3: PORT_6.3 RA_38.6 | length 112.6
  Top Layer w0.254: RA_38.6@777.25,668.55 777.25,667.645 778.561,666.334 870.856,666.334 PORT_6.3@883.25,653.94
PGIO_6_4: PORT_6.4 RA_38.7 | length 115.8
  Top Layer w0.254: RA_38.7@776.35,668.55 776.35,667.2 777.67,665.88 870.42,665.88 882.1,654.2 882.1,652.55 PORT_6.4@883.25,651.4
PGIO_6_5: PORT_6.5 RA_36.0 | length 113.4
  Top Layer w0.254: RA_36.0@773.85,668.55 773.85,667.645 776.069,665.426 869.224,665.426 PORT_6.5@880.71,653.94
PGIO_6_6: PORT_6.6 RA_36.1 | length 116.7
  Top Layer w0.254: RA_36.1@772.95,668.55 772.95,666.977 774.955,664.972 868.678,664.972 879.4,654.25 879.4,652.71 PORT_6.6@880.71,651.4
PGIO_6_7: PORT_6.7 RA_36.2 | length 113.3
  Top Layer w0.254: RA_36.2@772.05,668.55 772.05,666.604 774.136,664.518 867.592,664.518 PORT_6.7@878.17,653.94
PGIO_6_8: PORT_6.8 RA_36.3 | length 116.4
  Top Layer w0.254: RA_36.3@771.15,668.55 771.15,666.232 773.318,664.064 867.136,664.064 876.719,654.481 876.719,652.851 PORT_6.8@878.17,651.4
PGIO_7_1: PORT_7.1 RA_41.4 | length 93.5
  Top Layer w0.254: RA_41.4@768.777,668.55 768.777,667.223 772.39,663.61 845.82,663.61 PORT_7.1@855.49,653.94
PGIO_7_2: PORT_7.2 RA_41.5 | length 96.8
  Top Layer w0.254: RA_41.5@767.877,668.55 767.877,666.85 771.571,663.156 845.632,663.156 854.039,654.749 854.039,652.851 PORT_7.2@855.49,651.4
PGIO_7_3: PORT_7.3 RA_41.6 | length 93.2
  Top Layer w0.254: RA_41.6@766.977,668.55 766.977,666.477 770.752,662.702 844.188,662.702 PORT_7.3@852.95,653.94
PGIO_7_4: PORT_7.4 RA_41.7 | length 96.3
  Top Layer w0.254: RA_41.7@766.077,668.55 766.077,666.104 769.934,662.248 843.642,662.248 851.75,654.14 851.75,652.6 PORT_7.4@852.95,651.4
PGIO_7_5: PORT_7.5 RA_39.0 | length 93.8
  Top Layer w0.254: RA_39.0@763.641,668.55 763.641,666.959 768.806,661.794 842.556,661.794 PORT_7.5@850.41,653.94
PGIO_7_6: PORT_7.6 RA_39.1 | length 96.9
  Top Layer w0.254: RA_39.1@762.741,668.55 762.741,666.586 767.987,661.34 842.16,661.34 849.2,654.3 849.2,652.61 PORT_7.6@850.41,651.4
PGIO_7_7: PORT_7.7 RA_39.2 | length 93.4
  Top Layer w0.254: RA_39.2@761.841,668.55 761.841,666.214 767.168,660.886 840.924,660.886 PORT_7.7@847.87,653.94
PGIO_7_8: PORT_7.8 RA_39.3 | length 96.6
  Top Layer w0.254: RA_39.3@760.941,668.55 760.941,665.841 766.35,660.432 840.568,660.432 846.7,654.3 846.7,652.57 PORT_7.8@847.87,651.4
PORT_1_1: RA_23.0 X2.38 | length 7.9
  Top Layer w0.254: RA_23.0@775.35,621.85 775.35,619.75 777.002,618.098 777.002,615.962 X2.38@776.04,615
PORT_1_2: RA_23.1 X2.39 | length 6.9
  Top Layer w0.254: X2.39@773.5,615 774.462,615.962 RA_23.1@774.462,621.502
PORT_1_3: RA_23.2 X2.24 | length 4.3
  Top Layer w0.254: X2.24@773.5,617.54 773.5,621.8 RA_23.2@773.55,621.85
PORT_1_4: RA_23.3 X2.40 | length 7.7
  Top Layer w0.254: X2.40@770.96,615 771.3,615 772.4,616.1 772.4,619.4 772.65,619.65 RA_23.3@772.65,621.85
PORT_1_5: RA_21.4 X2.23 | length 4.6
  Top Layer w0.254: RA_21.4@770.15,621.85 770.15,619.45 770.96,618.64 X2.23@770.96,617.54
PORT_1_6: RA_21.5 X2.41 | length 7.4
  Top Layer w0.254: X2.41@768.42,615 769.5,616.08 769.5,620.2 769.25,620.45 RA_21.5@769.25,621.85
PORT_1_7: RA_21.6 X2.22 | length 4.2
  Top Layer w0.254: X2.22@768.42,617.54 RA_21.6@768.42,621.78
PORT_1_8: RA_21.7 X2.42 | length 7.5
  Top Layer w0.254: X2.42@765.88,615 767.45,616.57 RA_21.7@767.45,621.85
PORT_2_1: RA_26.3 X1.57 | length 4.6
  Top Layer w0.254: RA_26.3@727.686,670.25 727.686,674.706 X1.57@727.78,674.8
PORT_2_2: RA_26.2 X1.6 | length 7.5
  Top Layer w0.254: RA_26.2@726.786,670.25 726.786,676.346 X1.6@727.78,677.34
PORT_2_3: RA_26.1 X1.58 | length 4.8
  Top Layer w0.254: X1.58@725.24,674.8 725.886,674.154 RA_26.1@725.886,670.25
PORT_2_4: RA_26.0 X1.5 | length 8.1
  Top Layer w0.254: RA_26.0@724.986,670.25 724.986,672.214 723.9,673.3 723.9,676 X1.5@725.24,677.34
PORT_2_5: RA_24.7 X1.59 | length 4.4
  Top Layer w0.254: RA_24.7@722.55,670.25 X1.59@722.55,674.65
PORT_2_6: RA_24.6 X1.4 | length 7.5
  Top Layer w0.254: RA_24.6@721.65,670.25 721.65,676.29 X1.4@722.7,677.34
PORT_2_7: RA_24.5 X1.60 | length 4.8
  Top Layer w0.254: X1.60@720.16,674.8 720.75,674.21 RA_24.5@720.75,670.25
PORT_2_8: RA_24.4 X1.3 | length 8.3
  Top Layer w0.254: RA_24.4@719.85,670.25 719.85,672.85 v1(719.9,672.9)
  Bottom Layer w0.254: v1(719.9,672.9) 721.262,674.262 721.262,676.438 X1.3@720.16,677.54
PORT_3_1: RA_29.7 X1.53 | length 4.5
  Top Layer w0.254: RA_29.7@737.959,670.25 X1.53@737.959,674.781
PORT_3_2: RA_29.6 X1.10 | length 7.8
  Top Layer w0.254: RA_29.6@737.059,670.25 737.059,673.841 736.7,674.2 736.7,676.1 X1.10@737.94,677.34
PORT_3_3: RA_29.5 X1.54 | length 4.9
  Top Layer w0.254: X1.54@735.4,674.8 736.159,674.041 RA_29.5@736.159,670.25
PORT_3_4: RA_29.4 X1.9 | length 8.1
  Top Layer w0.254: RA_29.4@735.259,670.25 735.259,672.541 734.1,673.7 734.1,676.04 X1.9@735.4,677.34
PORT_3_5: RA_27.7 X1.55 | length 4.5
  Top Layer w0.254: RA_27.7@732.823,670.25 X1.55@732.823,674.763
PORT_3_6: RA_27.6 X1.8 | length 7.3
  Top Layer w0.254: RA_27.6@731.898,670.598 731.898,676.578 X1.8@732.86,677.54
PORT_3_7: RA_27.5 X1.56 | length 4.8
  Top Layer w0.254: X1.56@730.32,674.8 731.023,674.097 RA_27.5@731.023,670.25
PORT_3_8: RA_27.4 X1.7 | length 8.1
  Top Layer w0.254: RA_27.4@730.123,670.25 730.123,672.677 729,673.8 729,676.02 X1.7@730.32,677.34
PORT_4_1: RA_32.3 X1.49 | length 4.4
  Top Layer w0.254: RA_32.3@748.232,670.25 X1.49@748.232,674.668
PORT_4_2: RA_32.2 X1.14 | length 7.8
  Top Layer w0.254: RA_32.2@747.332,670.25 747.332,673.868 746.9,674.3 746.9,676.14 X1.14@748.1,677.34
PORT_4_3: RA_32.1 X1.50 | length 4.9
  Top Layer w0.254: X1.50@745.56,674.8 746.432,673.928 RA_32.1@746.432,670.25
PORT_4_4: RA_32.0 X1.13 | length 8.1
  Top Layer w0.254: RA_32.0@745.532,670.25 745.532,672.268 744.3,673.5 744.3,676.08 X1.13@745.56,677.34
PORT_4_5: RA_30.3 X1.51 | length 4.6
  Top Layer w0.254: X1.51@743.02,674.8 743.095,674.725 RA_30.3@743.095,670.25
PORT_4_6: RA_30.2 X1.12 | length 7.8
  Top Layer w0.254: RA_30.2@742.195,670.25 742.195,674.105 741.7,674.6 741.7,676.02 X1.12@743.02,677.34
PORT_4_7: RA_30.1 X1.52 | length 4.9
  Top Layer w0.254: X1.52@740.48,674.8 741.295,673.985 RA_30.1@741.295,670.25
PORT_4_8: RA_30.0 X1.11 | length 8.1
  Top Layer w0.254: RA_30.0@740.395,670.25 740.395,672.305 739.2,673.5 739.2,676.06 X1.11@740.48,677.34
PORT_5_1: RA_35.7 X1.45 | length 4.7
  Top Layer w0.254: X1.45@758.26,674.8 758.505,674.555 RA_35.7@758.505,670.25
PORT_5_2: RA_35.6 X1.18 | length 7.9
  Top Layer w0.254: RA_35.6@757.605,670.25 757.605,673.795 757,674.4 757,676.08 X1.18@758.26,677.34
PORT_5_3: RA_35.5 X1.46 | length 5
  Top Layer w0.254: X1.46@755.72,674.8 756.705,673.815 RA_35.5@756.705,670.25
PORT_5_4: RA_35.4 X1.17 | length 8.1
  Top Layer w0.254: X1.17@755.72,677.34 754.6,676.22 754.6,673 755.805,671.795 RA_35.4@755.805,670.25
PORT_5_5: RA_33.7 X1.47 | length 4.6
  Top Layer w0.2: X1.47@753.18,674.8 X1.47@753.368,674.612
  Top Layer w0.254: RA_33.7@753.368,670.25 X1.47@753.368,674.612
PORT_5_6: RA_33.6 X1.16 | length 7.8
  Top Layer w0.254: RA_33.6@752.468,670.25 752.468,674.032 752,674.5 752,676.16 X1.16@753.18,677.34
PORT_5_7: RA_33.5 X1.48 | length 4.9
  Top Layer w0.254: X1.48@750.64,674.8 751.568,673.872 RA_33.5@751.568,670.25
PORT_5_8: RA_33.4 X1.15 | length 8.1
  Top Layer w0.254: X1.15@750.64,677.34 749.4,676.1 749.4,673.6 750.668,672.332 RA_33.4@750.668,670.25
PORT_5_BNC_AO: P2.1 PORT_5.15 R4.1 | length 145.2
  Top Layer w0.254: PORT_5.15@807.41,653.94 806,652.53 806,649.336 812.736,642.6 851.1,642.6 857.9,635.8 857.9,622.7 P2.1@860.9,619.7 865.8,619.7 891.9,645.8 891.9,664.77 R4.1@889.014,667.656 R4.1@889.014,667.964
PORT_6_1: RA_38.3 X1.37 | length 4.9
  Top Layer w0.254: X1.37@778.58,675 778.604,674.976 778.604,673.388 779.05,672.942 RA_38.3@779.05,670.25
PORT_6_2: RA_38.2 X1.26 | length 7.9
  Top Layer w0.254: RA_38.2@778.15,670.25 778.15,673.65 777.4,674.4 777.4,676.16 X1.26@778.58,677.34
PORT_6_3: RA_38.1 X1.38 | length 5.1
  Top Layer w0.254: X1.38@776.04,674.8 777.25,673.59 RA_38.1@777.25,670.25
PORT_6_4: RA_38.0 X1.25 | length 8.2
  Top Layer w0.254: X1.25@776.04,677.34 774.8,676.1 774.8,674.3 776.35,672.75 RA_38.0@776.35,670.25
PORT_6_5: RA_36.7 X1.39 | length 4.7
  Top Layer w0.254: X1.39@773.5,674.8 773.85,674.45 RA_36.7@773.85,670.25
PORT_6_6: RA_36.6 X1.24 | length 7.9
  Top Layer w0.254: RA_36.6@772.95,670.25 772.95,673.85 772.2,674.6 772.2,676.04 X1.24@773.5,677.34
PORT_6_7: RA_36.5 X1.40 | length 5
  Top Layer w0.254: X1.40@770.96,674.8 772.05,673.71 RA_36.5@772.05,670.25
PORT_6_8: RA_36.4 X1.23 | length 8.2
  Top Layer w0.254: X1.23@770.96,677.34 770.94,677.34 769.7,676.1 769.7,674.2 771.15,672.75 RA_36.4@771.15,670.25
PORT_6_AO7: PORT_6.15 R16.1 | length 45.3
  Top Layer w0.254: PORT_6.15@868.01,653.94 866.65,652.58 866.65,650.225 869.575,647.3 887,647.3 889.5,649.8 889.5,659.4 R16.1@885.014,663.886
PORT_7_1: RA_41.3 X1.41 | length 4.7
  Top Layer w0.254: X1.41@768.42,674.8 768.777,674.443 RA_41.3@768.777,670.25
PORT_7_2: RA_41.2 X1.22 | length 8
  Top Layer w0.254: RA_41.2@767.877,670.25 767.877,673.723 767.1,674.5 767.1,676.02 X1.22@768.42,677.34
PORT_7_3: RA_41.1 X1.42 | length 5
  Top Layer w0.254: X1.42@765.88,674.8 766.977,673.703 RA_41.1@766.977,670.25
PORT_7_4: RA_41.0 X1.21 | length 8.1
  Top Layer w0.254: X1.21@765.88,677.34 764.7,676.16 764.7,674 766.077,672.623 RA_41.0@766.077,670.25
PORT_7_5: RA_39.7 X1.43 | length 4.2
  Top Layer w0.254: RA_39.7@763.641,670.25 X1.43@763.641,674.499
PORT_7_6: RA_39.6 X1.20 | length 7.8
  Top Layer w0.254: RA_39.6@762.741,670.25 762.741,673.859 762.2,674.4 762.2,676.2 X1.20@763.34,677.34
PORT_7_7: RA_39.5 X1.44
PORT_7_8: RA_39.4 X1.19 | length 8.1
  Top Layer w0.254: X1.19@760.8,677.34 759.6,676.14 759.6,673.2 760.941,671.859 RA_39.4@760.941,670.25
PORT_7_AO6: PORT_7.15 R3.1 | length 81.3
  Top Layer w0.254: PORT_7.15@837.71,653.94 836.275,652.505 836.275,649.625 840.2,645.7 888.575,645.7 890.7,647.825 890.7,662.085 R3.1@887.014,665.771
R_VAR: R_VAR1.2 X1.32 | length 184.8
  Top Layer w0.254: X1.32@798.875,675 801.021,672.854 886.046,672.854 892.859,666.041 892.859,645.059 865.9,618.1 858.9,618.1 850.3,626.7 R_VAR1.2@841.5,626.7
SOUND: R6.1 X2.58 | length 47.6
  Top Layer w0.254: R6.1@698.1,578.6 725.24,605.74 X2.58@725.24,615
UART_RX: PORT_5.10 PORT_6.10 PORT_7.10 X1.36 X4.2 | length 118.7
  Top Layer w0.254: v1(800.878,655.242) 800.909,655.211 812.889,655.211 813.7,654.4 813.7,652.73 PORT_5.10@815.03,651.4 817.13,649.3 828.084,649.3 834.684,655.9 842.578,655.9 844.025,654.453 844.025,652.705 PORT_7.10@845.33,651.4 848.03,648.7 857.842,648.7 865.142,656 872.57,656 874.4,654.17 874.4,652.63 PORT_6.10@875.63,651.4
  Bottom Layer w0.254: X1.36@781.12,675 v1(800.878,655.242)
UART_TX: PORT_5.9 PORT_6.9 PORT_7.9 X1.27 X4.3 | length 118
  Top Layer w0.254: v1(802.722,655.938) 802.76,655.9 813.07,655.9 PORT_5.9@815.03,653.94 815.03,653.052 816.4,651.682 816.4,650.672 817.232,649.84 827.86,649.84 834.46,656.44 842.83,656.44 PORT_7.9@845.33,653.94 845.33,653.07 846.6,651.8 846.6,650.772 848.218,649.154 857.654,649.154 864.954,656.454 873.116,656.454 PORT_6.9@875.63,653.94
  Bottom Layer w0.254: X1.27@781.12,677.54 v1(802.722,655.938)
VCC3.3: C17.1 P0RT_3.11 PORT_1.11 PORT_2.11 PORT_4.11 PORT_5.11 PORT_6.11 PORT_7.11 R9.1 R10.1 R11.1 R18.2 R19.2 RA16.0 RA16.1 RA16.2 RA16.3 RA19.0 RA19.1 RA19.2 RA19.3 RA_1.5 RA_1.6 RA_1.7 V3.3.1 X1.0 X1.1 X1.2 X2.61 X2.62 X2.63 XP16_4.11 XP16_5.11 XP16_6.11 XP16_7.11
  other v1: 885.2,707.125 884.05,708.275
VCC5: 2.22 2.23 2.31 2.32 C2.2 C3.2 C4.2 C5.2 C6.1 C16.1 J1.0 matrix.1 P0RT_3.12 PORT_1.12 PORT_2.12 PORT_4.12 PORT_5.12 PORT_6.12 PORT_7.12 R7.1 R8.1 R_VAR1.1 R_VAR3.3 SREG1.9 SREG1.14 SREG2.9 SREG2.14 SREG3.9 SREG3.14 SREG4.9 SREG4.14 V3.3.2 WG1.1 X3.1 X4.1 XP16_4.12 XP16_5.12 XP16_6.12 XP16_7.12 | length 41.5
  Top Layer w1: WG1.1@767.22,540 767.22,542.02 768.6,543.4 R_VAR3.3@806.1,543.4
  other v1: 837.5,675.346 835.575,675.367 887.4,676.6 888.75,678.15 876.3,695.725 875.075,696.8 861.975,702.275 863.45,702.275
VCC5_IN: DS.1 J1.1
pads on no net: 1.h1 1.h2 1.h3 1.h4 3.5 3.10 3.11 3.22 3.47 3.48 3.71 3.72 3.83 3.88 3.97 3.109 3.113 EC.0 R_VAR1.4 R_VAR1.5 RA17.0 RA17.7 RA_1.3 RA_1.4 RA_2.0 RA_2.1 RA_2.2 RA_2.3 RA_3.0 RA_3.1 RA_3.2 RA_3.3 WG1.hole WG1.hole1 WG1.hole2 WG1.hole4 X1.31 XP16_2.9 XP16_2.10 XP16_3.3 XP16_3.4 XP16_3.5 XP16_3.6 XP16_3.7 XP16_3.8 XP16_3.11 XP16_3.12 XP16_3.13 XP16_3.14 XP16_6.14 XP16_6.15 XP16_6.16 XP16_7.10 XP16_7.16
copper on no net: | length 0.1
  Bottom Layer w0.2: -24.5,1590.35 -24.5,1590.425 -24.5,1590.35

## Polygon pours and split planes (outlines as drawn)
VCC5 on Bottom Layer "vcc5" (hatched 90Degree grid 0.508 track 0.203, pour order 559): 837.875,674.5 839.1,675.725 839.125,675.725 839.125,675.95 838.525,676.55 835.023,676.55 834.198,675.725 815.125,675.725 813.625,677.225 813.625,681.925 812.9,682.65 811.55,682.65 810.725,681.825 810.725,676.2 812.75,674.175 837.55,674.175
VCC5 on Bottom Layer "vcc5" (hatched 90Degree grid 0.508 track 0.203, pour order 565): 886.2,677.048 886.2,676 888.745,673.455 888.745,649.745 886.2,647.2 876.061,647.2 874.3,648.961 874.3,652 873.636,652.664 872.409,652.664 871.792,652.047 871.792,648.904 870.088,647.2 845.9,647.2 843.9,649.208 843.9,652.1 843.3,652.7 842.1,652.7 841.5,652.1 841.5,648.963 839.545,647.008 815.292,647.008 813.7,648.6 813.7,652 813.1,652.6 811.6,652.6 811.1,652.1 811.1,648.737 811.1,644.7 812.1,643.7 888.432,643.7 891.7,646.968 891.7,678.13 890.946,678.884 888.42,678.884
VCC3.3 on Bottom Layer "vcc3.3" (hatched 90Degree grid 0.508 track 0.203, pour order 553): 864.85,708.64 863.675,709.7 863.675,711.6 863.675,712.875 863.975,713.175 868.9,713.175 870.204,711.871 887.854,711.871 893.35,706.375 893.35,700.2 888.925,695.775 879.625,686.475 875.834,686.475 874.356,684.997 874.378,683.329 873.602,682.675 872.437,682.675 871.712,683.474 871.712,686.475 844.716,686.384 843.7,685.368 843.7,683.45 843.098,682.928 841.572,682.928 841.026,683.474 841.026,685.344 839.895,686.475 814.85,686.475 814.075,686.475 813.425,685.825 813.425,683.199 813.212,682.927 811.332,682.927 810.879,683.379 810.879,685.6 808.628,686.608 804.85,686.95 802.009,686.8 802.009,660.65 800.705,660.65 800.4,689.3 814.305,689.3 834.9,689.3 870.1,689.3 877.009,689.3 888.415,700.706 888.415,702.323 882.66,708.64
VCC5 on Bottom Layer "vcc5" (hatched 90Degree grid 0.508 track 0.203, pour order 551): 861.025,701.575 865,697.6 872.5,697.6 875.6,694.5 876.55,694.5 877.518,695.468 877.518,696.418 874.475,699.462 874.475,700.35 873.725,701.1 867.725,701.1 864.925,703.9 861.475,703.9 861.025,703.45
GND on Bottom Layer "GND" (hatched 45Degree grid 0.508 track 0.21, remove dead copper, shelved, pour order 532): 622,725 616,719 616,517 617,516 622,511 888,511 889,512 894,517 894,719 893,720 888,725 810,725 700,725
EVCC5 on Bottom Layer "EVCC5" (hatched 90Degree grid 0.508 track 0.203, pour order 531): 788.1,720.5 788.1,718 797,709.1 842.008,709.1 847.908,715 851.035,715 852.1,716.065 852.1,719.3 851,720.4 843.968,720.4 838.668,715.1 796,715.1 791.7,719.4 791.7,720.5
VCC5_IN on Bottom Layer "vcc_in" (hatched 90Degree grid 0.508 track 0.203, pour order 530): 884.1,713.7 884.6,714.2 884.6,716 884.1,716.5 872.2,716.5 868.2,720.5 856.351,720.5 854.9,719.049 854.9,715.42 856.7,713.62 869,713.5 870.3,712.3 882.32,712.275 884,713.62
VCC5 on Bottom Layer "vcc5" (hatched 90Degree grid 0.508 track 0.203, shelved, pour order 561): 886.145,676.005 886.145,677.58 888.095,679.53 891.045,679.53 893.095,677.48 893.095,649.105 893.095,613.852 889.63,610.237 855.4,610.237 852.175,613.271 852.175,642.2 857.075,642.2 857.075,613.946 857.75,613.271 861.575,613.271 887.761,613.271 889.445,614.955 889.445,643.105 887.215,645.335 872.17,645.405 871.395,646.18 871.399,648.609 871.845,649.055 871.845,652.23 872.345,652.73 873.845,652.73 874.345,652.23 874.345,649.055 874.82,648.58 887.086,648.58 889.445,650.939 889.445,672.905 887.57,674.78
VCC5 on Top Layer "vcc5" (hatched 90Degree grid 0.508 track 0.203, pour order 557): 874.325,696.475 877.775,693.025 883.725,693.025 887.825,688.911 887.825,679.825 886.8,678.8 874.85,678.8 874.325,679.325 874.325,682.125 873.675,682.775 872.438,682.775 871.925,682.262 871.925,679.5 871.225,678.8 844.499,678.8 843.55,679.75 843.55,681.975 842.825,682.7 841.95,682.7 841.275,682.025 841.275,679.7 840.375,678.8 839.75,678.8 837.475,678.8 834.563,675.888 834.563,674.913 834.975,674.5 837.863,674.5 838.887,675.525 887.941,675.525 891.1,678.684 891.1,685.625 891.1,691.725 885.225,697.6 874.25,697.6 873.75,697.1
VCC3.3 on Top Layer "vcc3.3" (hatched 90Degree grid 0.508 track 0.203, pour order 555): 886.15,707.263 886.15,707.65 884.65,709.15 883.925,709.15 880.425,705.65 873.825,705.65 871.975,703.8 871.975,701.875 872.775,701.075 876.102,701.075 877.034,702.007 877.034,702.809 878.025,703.8 882.687,703.8
GND on Top Layer "GND_TOP" (hatched 45Degree grid 0.508 track 0.21, remove dead copper, shelved, pour order 534): 622,725 616,719 616,517 617,516 622,511 888,511 889,512 894,517 894,719 893,720 888,725 810,725 700,725
EVCC5 on Top Layer "EVCC5" (hatched 90Degree grid 0.508 track 0.203, shelved, pour order 533): 796.464,711 797,711.536 797,712.254 794.254,715 790.167,715 784.5,709.333 784.5,708.23 788.23,704.5 789.964,704.5
VCC5 on Top Layer "vcc5" (hatched 90Degree grid 0.508 track 0.203, pour order 542): 852,718.9 852,711.136 855.136,708 860.1,708 861.1,707 861.1,701.8 861.907,700.993 863.357,700.993 864.163,701.8 864.163,707 865.163,708 870.363,708 870.9,708.537 870.9,710.7 870.576,711.024 855.897,711.024 855,711.921 855,718.8 854.426,719.374 852.374,719.374 851.9,718.9

## Keep-outs
Mechanical 1:
  circle w0.127: c643.515,522.097 r3.96
  lines w0.127: 621.715,510.187 888.415,510.187

## Other copper
Top Layer:
  pour cut-out: 681.314,696.933 682.539,695.708 713.102,695.708 728.508,711.114 728.508,719.278 727.778,720.008 726.008,720.008 725.294,719.294 725.294,714.517 715.284,704.508 683.308,704.508 681.3,702.5
Bottom Layer:
  pour cut-out: 681.306,696.925 682.531,695.7 713.094,695.7 728.5,711.106 728.5,719.27 727.77,720 726,720 725.286,719.286 725.286,714.51 715.276,704.5 683.3,704.5 681.292,702.492

## Silkscreen, mask and mechanical layers (free items; w line width, h text height)
Mechanical 1:
  circle w0.127: c879,720 r2.5
  circle w0.127: c863.015,522.097 r3.96
  circle w0.127: c631.315,719.937 r2.5
  lines w0.127: 621.715,510.187 615.365,516.537 615.365,719.737 621.715,726.087 709.083,726.087 709.345,725.825 709.345,718.217 715.445,718.217 715.445,725.835 715.698,726.087 729.882,726.087 ; 801.117,726.087 888.415,726.087 894.765,719.737 894.765,516.537 888.415,510.187 ; 707.615,522.887 ccw(c713.965,522.887) 713.965,516.537 732.205,516.537 ccw(c732.205,522.887) 738.555,522.887 738.555,529.237 ccw(c732.205,529.237) 732.205,535.587 713.965,535.587 ccw(c713.965,529.237) 707.615,529.237 707.615,522.887 ; 743.635,522.887 ccw(c749.985,522.887) 749.985,516.537 760.145,516.537 ccw(c760.145,522.887) 766.495,522.887 766.495,529.237 ccw(c760.145,529.237) 760.145,535.587 749.985,535.587 ccw(c749.985,529.237) 743.635,529.237 743.635,522.887 ; 771.575,522.887 ccw(c777.925,522.887) 777.925,516.537 793.165,516.537 ccw(c793.165,522.887) 799.515,522.887 799.515,529.237 ccw(c793.165,529.237) 793.165,535.587 777.925,535.587 ccw(c777.925,529.237) 771.575,529.237 771.575,522.887
Mechanical 8:
  lines w0.45: 615.4,719.7 888.4,510.2 ; 621.7,510.2 894.8,719.7

## Text inside footprints (layer, text, board x,y; h text height)
C6: Top Overlay "+" at 645.125,724.686 h0.75 r270
C7: Top Overlay "+" at 692.125,723.697 h0.75 r270
C10: Top Overlay "+" at 701.326,713.166 h0.75 r90
X3: Top Overlay "GND" at 700.499,619.8 h1.2 r90; Top Overlay "SCL" at 697.933,619.8 h1.2 r90; Top Overlay "SDA" at 695.366,619.8 h1.2 r90; Top Overlay "VCC" at 692.799,619.8 h1.2 r90
X4: Top Overlay "GND" at 760.931,694.6 h1.2 r90; Top Overlay "TXD" at 758.364,694.6 h1.2 r90; Top Overlay "RXD" at 755.798,694.6 h1.2 r90; Top Overlay "VCC" at 753.231,694.6 h1.2 r90